# Altium PCB BoardV2.0.PcbDoc
Units mil, origin at the board's own origin, x right, y up, seen from the top; angles counter-clockwise.
Board outline 1628.8 x 2691.79 mil, 2 copper layers (Top Layer, Bottom Layer), stack 65.792 mil thick; 32 components, 24 nets, 140 pads, 14 vias.
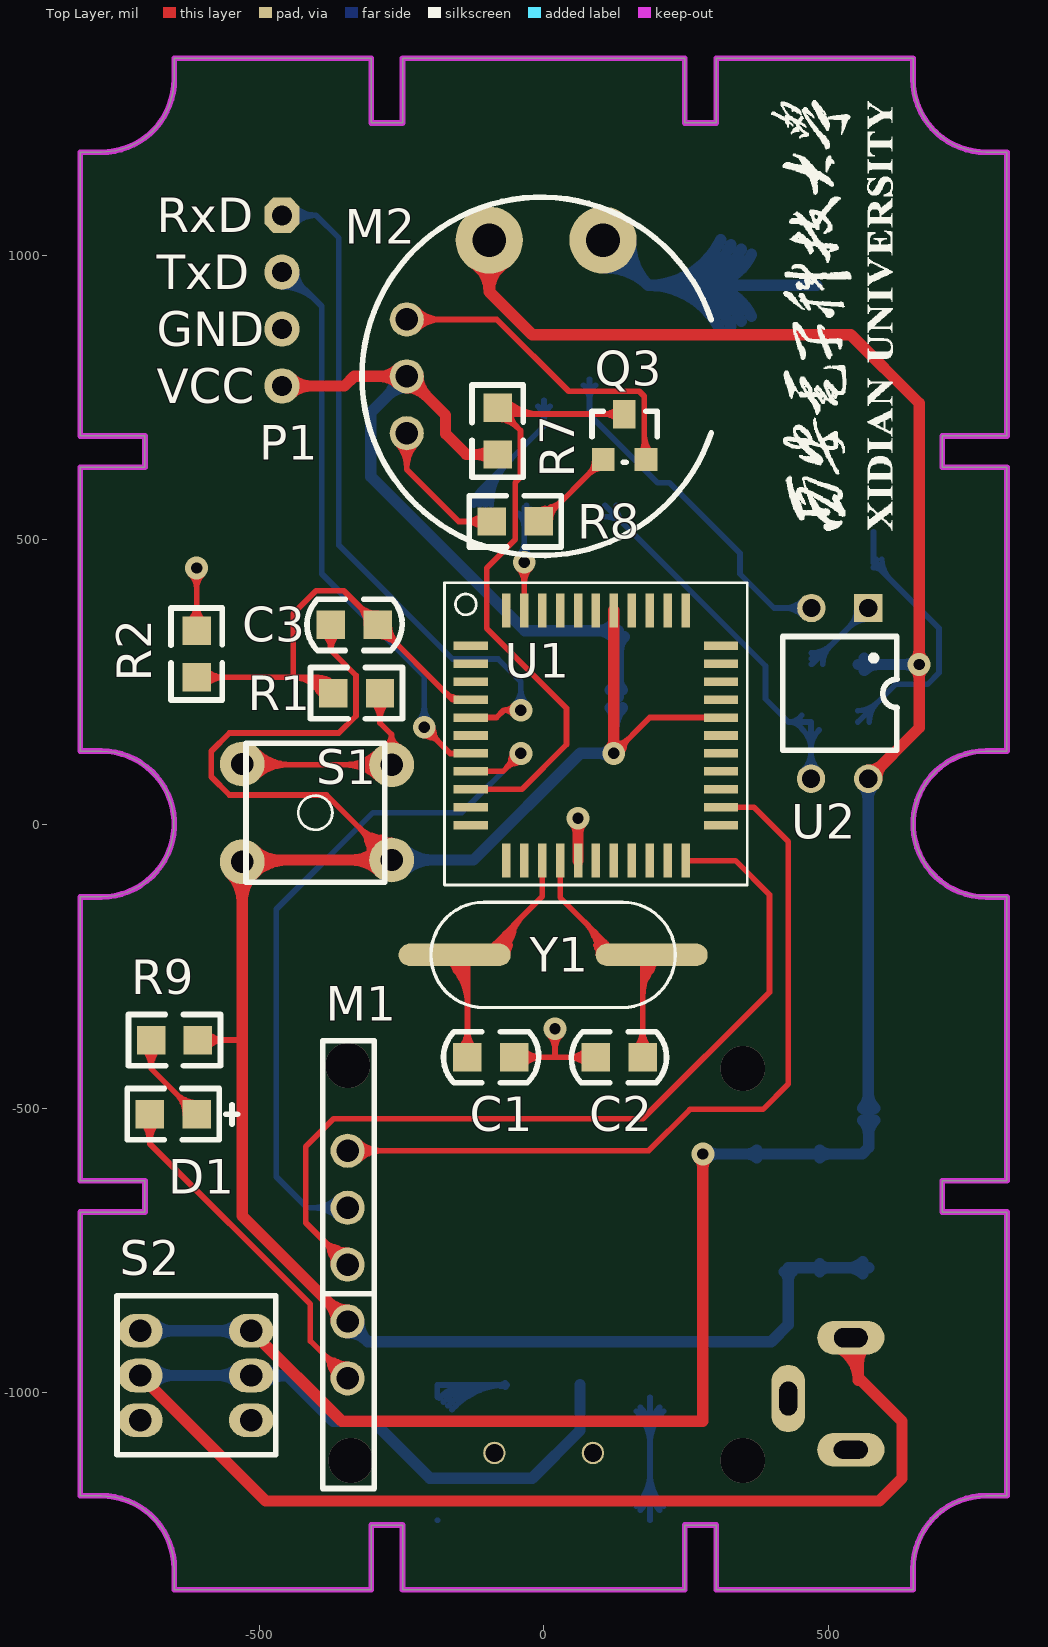
[diagram p0: Top Layer view]
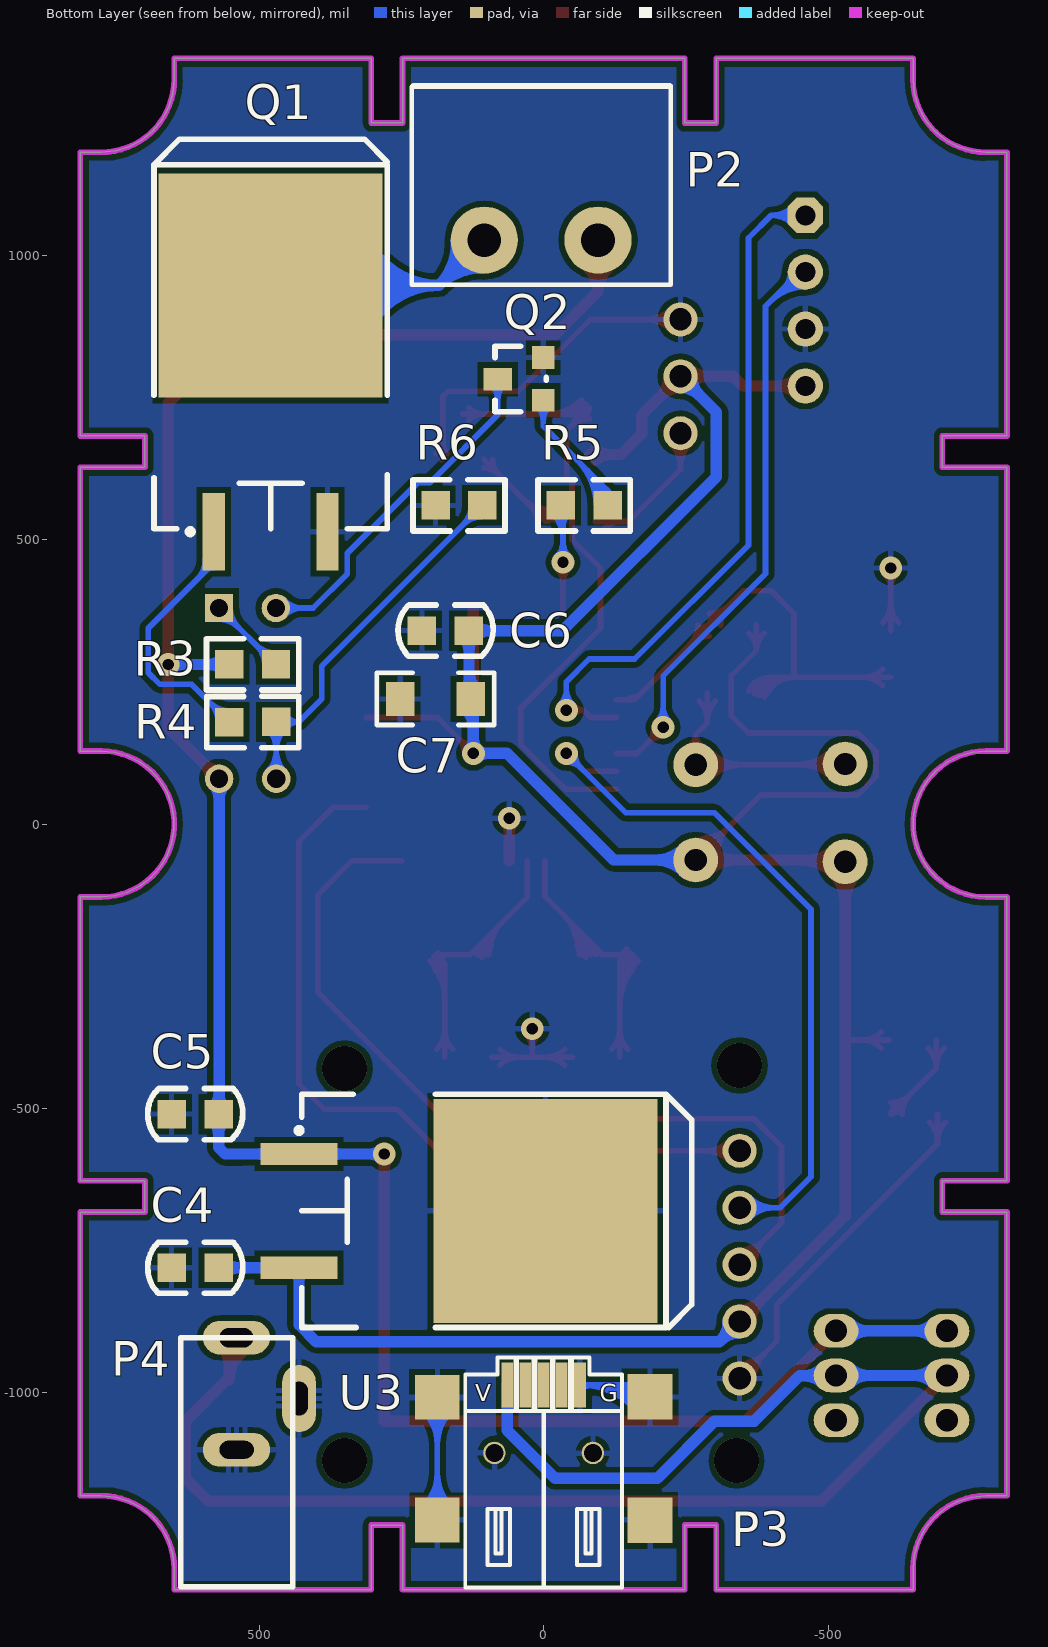
[diagram p1: Bottom Layer view, seen from below]
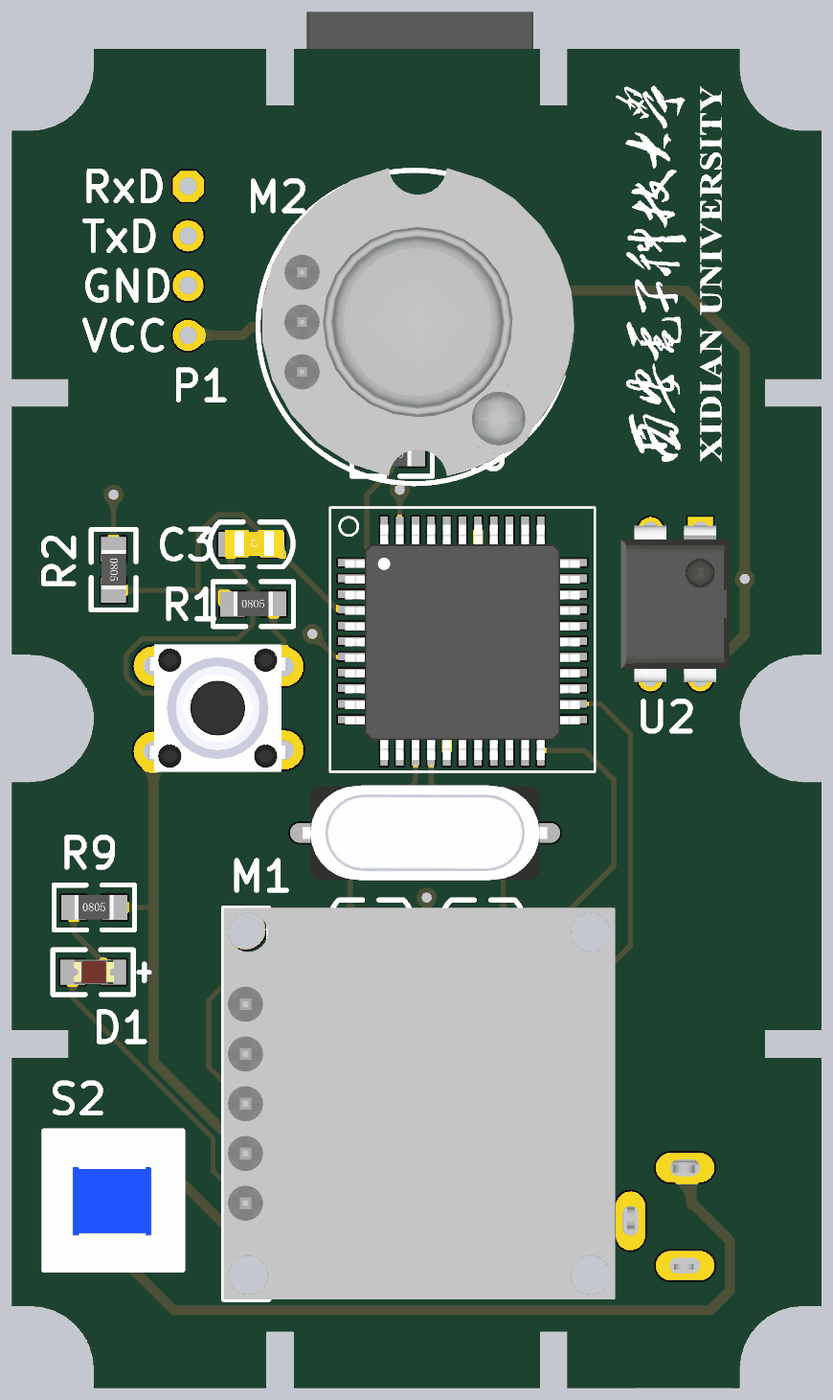
[diagram p2: 3D render of the assembled board from above, using the file's embedded part models]
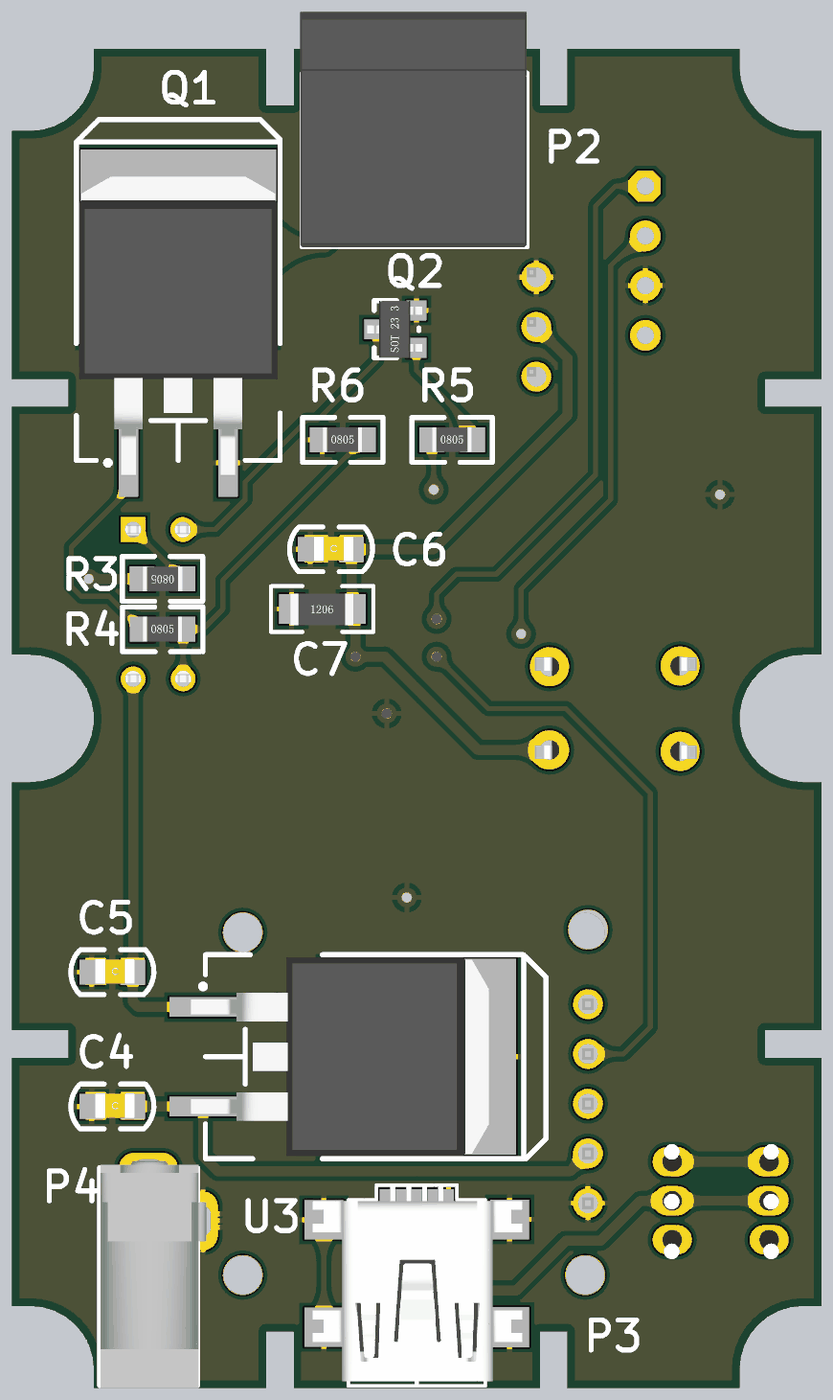
[diagram p3: 3D render of the assembled board from below, using the file's embedded part models]

## Layer stack, top to bottom
Top Solder: solder mask 0.4, Solder Resist, Dk 3.5
Top Layer: signal copper 1.4
Dielectric 1: dielectric 62.992, FR-4, Dk 4.8
Bottom Layer: signal copper 1.4
Bottom Solder: solder mask 0.4, Solder Resist, Dk 3.5

## Board outline
814.4,626.97 700.79,626.97 700.79,682.09 814.4,682.09 814.4,1180.84 777.56,1180.84 752.55,1183.3 728.49,1190.6 706.33,1202.45 686.9,1218.39 670.95,1237.82 659.1,1259.99 651.81,1284.04 649.34,1309.06 649.34,1345.9 303.15,1345.9 303.15,1232.28 248.03,1232.28 248.03,1345.9 -248.03,1345.9 -248.03,1232.28 -303.15,1232.28 -303.15,1345.9 -649.34,1345.9 -649.34,1309.06 -651.81,1284.04 -659.1,1259.99 -670.95,1237.82 -686.9,1218.39 -706.33,1202.45 -728.49,1190.6 -752.54,1183.3 -777.56,1180.84 -814.4,1180.84 -814.4,682.09 -700.79,682.09 -700.79,626.97 -814.4,626.97 -814.4,128.22 -777.56,128.22 -754,126.03 -731.24,119.56 -710.06,109.01 -691.18,94.75 -675.24,77.27 -662.78,57.15 -654.24,35.09 -649.89,11.83 -649.89,-11.83 -654.24,-35.09 -662.78,-57.15 -675.24,-77.27 -691.18,-94.75 -710.06,-109.01 -731.24,-119.56 -754,-126.03 -777.56,-128.21 -814.4,-128.21 -814.4,-626.97 -700.79,-626.97 -700.79,-682.09 -814.4,-682.09 -814.4,-1180.84 -777.56,-1180.84 -752.54,-1183.3 -728.49,-1190.6 -706.33,-1202.45 -686.9,-1218.39 -670.95,-1237.82 -659.1,-1259.99 -651.81,-1284.04 -649.34,-1309.05 -649.34,-1345.89 -303.15,-1345.89 -303.15,-1232.28 -248.03,-1232.28 -248.03,-1345.89 248.03,-1345.89 248.03,-1232.28 303.15,-1232.28 303.15,-1345.89 649.34,-1345.89 649.34,-1309.05 651.81,-1284.04 659.1,-1259.99 670.95,-1237.82 686.9,-1218.39 706.33,-1202.45 728.49,-1190.6 752.55,-1183.3 777.56,-1180.84 814.4,-1180.84 814.4,-682.09 700.79,-682.09 700.79,-626.97 814.4,-626.97 814.4,-128.21 777.56,-128.21 754,-126.03 731.24,-119.56 710.06,-109.01 691.18,-94.75 675.24,-77.27 662.79,-57.15 654.24,-35.09 649.89,-11.83 649.89,11.83 654.24,35.09 662.79,57.15 675.24,77.27 691.18,94.75 710.06,109.01 731.24,119.56 754,126.03 777.56,128.22 814.4,128.22

## Design rules (kind name [scope] priority, off if disabled: settings)
Clearance Clearance_1 [All] p1: gap=10
Clearance [InNet('GND') vs OnLayer('Keep-Out Layer')] p2: gap=50
PlaneClearance [All] p1: clearance=30
PolygonConnect [All] p1: connectstyle=Relief reliefconductorwidth=10 reliefentries=4 polygonreliefangle="90 Angle" airgapwidth=10
RoomDefinition Reset [InComponentClass('Reset')] p1: confinementstyle=ConfineIn formatcopy=TRUE lockcomponents=FALSE outline -814.4,-130 -210,-130 -210,610 -814.4,610
RoomDefinition Power [InComponentClass('Power')] p2: confinementstyle=ConfineIn formatcopy=TRUE lockcomponents=FALSE outline -820,-1362.47 830,-1362.47 830,-190 -820,-190
RoomDefinition Oscillator [InComponentClass('Oscillator')] p3: confinementstyle=ConfineIn formatcopy=TRUE lockcomponents=FALSE outline -264.8,-830 443.86,-830 443.86,-121.34 -264.8,-121.34
RoomDefinition Microcontroller_STC12C5A60S2 [InComponentClass('Microcontroller_STC12C5A60S2')] p4: confinementstyle=ConfineIn formatcopy=TRUE lockcomponents=FALSE outline -810,-120 620,-120 620,1360 -810,1360
RoomDefinition Level_Switch [InComponentClass('Level_Switch')] p5: confinementstyle=ConfineIn formatcopy=TRUE lockcomponents=FALSE outline -169.36,441.78 421.19,441.78 421.19,948.43 -169.36,948.43
RoomDefinition LED [InComponentClass('LED')] p6: confinementstyle=ConfineIn formatcopy=TRUE lockcomponents=FALSE outline 249.03,1390.42 -262.78,1390.42 -262.78,760.5 249.03,760.5
RoomDefinition Human_Body_Detection [InComponentClass('Human_Body_Detection')] p7: confinementstyle=ConfineIn formatcopy=TRUE lockcomponents=FALSE outline -358.66,432.6 350,432.6 350,1220 -358.66,1220
RoomDefinition Gesture_Recognition [InComponentClass('Gesture_Recognition')] p8: confinementstyle=ConfineIn formatcopy=TRUE lockcomponents=FALSE outline -427.56,-1207.56 438.58,-1207.56 438.58,-262.68 -427.56,-262.68
RoomDefinition Amplifier [InComponentClass('Amplifier')] p9: confinementstyle=ConfineIn formatcopy=TRUE lockcomponents=FALSE outline -842.1,-2.65 810,-2.65 810,1460 -842.1,1460
RoutingVias [All] p1: holewidth=28 width=50 viastyle="Through Hole" minholewidth=28 minwidth=50 maxholewidth=28 maxwidth=50
SolderMaskExpansion [All] p1: expansion=4
Width [All] p1: maxlimit=10 minlimit=10 preferedwidth=10
28 further rules are at their usual default settings.

## Classes and differential pairs
component class Amplifier: Q1 Q2 R3 R4 R5 R6 U2
component class Gesture_Recognition: M1
component class Human_Body_Detection: M2
component class LED: P2
component class Level_Switch: Q3 R7 R8
component class Microcontroller_STC12C5A60S2: C6 C7 P1 U1
component class Oscillator: C1 C2 Y1
component class Power: C4 C5 D1 P3 P4 R9 S2 U3
component class Reset: C3 R1 R2 S1

## Components (designator, comment, footprint, x,y, rotation, side; value= is the part's Value field where it differs from the comment)
C1 "Cap" C0805 -140,-410 r0 top
C2 "Cap" C0805 180,-410 r180 top
C3 "Cap" C0805 -380,350 r0 top
C4 "Cap" C0805 660,-780 r180 bottom
C5 "Cap" C0805 660,-510 r180 bottom
C6 "Cap" C0805 220,340 r180 bottom
C7 "Cap" 1206C 190,220 r180 bottom
D1 "LED" L0805R -610,-510 r180 top
M1 "PAJ7620U2" PAJ7620U2_INTERFACE 5.51,-774.49 r0 top
M2 "Human_Sensor" PM-6 -4.33,786.93 r0 top
P1 "Header 4" HDR1X4HA -460,1070 r270 top
P2 "Header 2" CCM-5.08-2P -223.17,947.66 r0 bottom
P3 "USB" USB-MINI 0,-1150 r180 bottom
P4 "Power_Connect" DC_002 540,-1100 r90 bottom
Q1 "MOSFET-N" TO-263 479.89,513.82 r180 bottom
Q2 "NPN" SOT-23 0,740 r90 bottom
Q3 "NPN" SOT-23 100,640 r0 top
R1 "Res1" R0805 -370,230 r0 top
R2 "Res1" R0805 -610,340 r270 top
R3 "Res1" R0805 470.49,280.68 r0 bottom
R4 "Res1" R0805 552.34,179.23 r180 bottom
R5 "Res1" R0805 -30,560 r180 bottom
R6 "Res1" R0805 190,560 r180 bottom
R7 "Res1" R0805 -80.84,731.78 r270 top
R8 "Res1" R0805 -90.84,531.78 r0 top
R9 "Res1" R0805 -690,-380 r0 top
S1 "SW-PB" KEY-DIP4 -400,20 r180 top
S2 "SW-PB" SW7X7 -750,-830 r0 top
U1 "STC12C5A60S2_44PIN" STC12C5A60S2_44PIN -128.03,313.07 r0 top
U2 "Optoisolator1" DIP_4 415,225 r180 top
U3 "LM7805" TO-263 430,-680 r270 bottom
Y1 "XTAL" XTAL-HC49S-SMD 115.2,-230 r180 top

## Footprints (in the part's own frame and the unit in brackets; to place one, negate y for a bottom-side part, rotate by r counter-clockwise, add the part's x,y. Pads: shape width x height; smd on the part's side, far side on the other; paste and mask are expansions set on the pad)
1206C [mil] "3.2mmx1.6mm（蒜米工坊）"
  rect 50x60 smd: 1(-62,0) 2(62,0)
  silkscreen extent -103,-46 103,46, body extent -64,-32 62,31, height 24
C0805 [mil]
  rect 50x50 smd: 1(6,0) 2(88.7,-0.1)
  silkscreen extent -36,-45 131,45, body extent -6,-26 112,29, height 37
CCM-5.08-2P [mm]
  round 3 hole 1.5: 1(3.24,-2) 2(8.32,-2)
  silkscreen extent 0,-8.88 11.56,0, body extent 0.06,-12 11.62,0, height 8.5
DC_002 [mm]
  round 1.5 hole 0.8: 1(0,-0.381) 1(0,0.356) 2(5.004,-0.33) 2(5.004,0.33) 3(1.956,-2.794) 3(2.642,-2.794)
  oval 1.5x3 hole 0.8 slot 1.5 at 90 deg: 1(0,0)
  oval 1.5x3 hole 0.86 slot 1.5 at 90 deg: 2(5.004,0)
  oval 3x1.5 hole 0.8 slot 1.5 at 0 deg: 3(2.286,-2.794)
  silkscreen extent -6.12,-2.51 5,2.49, body extent -6.26,-2.96 5.34,2.44, height 7.4
DIP_4 [mil]
  rect 50x50 hole 32: 1(-155.68,-154.68)
  round 50 hole 32: 2(-55.68,-154.68) 3(-55,145.5) 4(-155.5,145.5)
  silkscreen extent -206,-105 -5,95, body extent -214,-162 4,152, height 168
HDR1X4HA [mil]
  oct 62x62 hole 35: 1(0,0)
  round 62 hole 35: 2(100,0) 3(200,0) 4(300,0)
KEY-DIP4 [mm] "6X6"
  round 2 hole 1: 1(-3.373,2.116) 1(3.299,2.189) 2(-3.373,-2.134) 2(3.299,-2.172)
  silkscreen extent -3.06,-3.09 3.13,3.1, body extent -4.12,-3.27 4.14,3.23, height 4.3
L0805R [mil] "1/8W"
  rect 50x50 smd: 1(0,0) 2(82.3,0.2)
  silkscreen extent -72,-45 122,45, body extent 0,-25 79,25, height 43
PAJ7620U2_INTERFACE [mil]
  round 60 hole 39.37: 1(-350,-200) 2(-350,-100) 3(-350,0) 4(-350,100) 5(-350,200)
  silkscreen extent -394,-394 -303,394, body extent -394,-394 394,394, height 210
PM-6 [mil] "Human_Sensor"
  round 60 hole 39.37: 1(-236.22,-100) 2(-236.22,0) 3(-236.22,100)
  silkscreen extent -315,-315 299,315, body extent -306,-300 321,319, height 460
R0805 [mil] "1/8W"
  rect 50x50 smd: 1(0,0) 2(82.3,0.2)
  silkscreen extent -40,-45 122,45, body extent 1,-24 80,25, height 22
SOT-23 [mil]
  rect 40x40 smd: 1(4.88,0.63) 2(79.88,0.63)
  rect 40x50 smd: 3(41.88,80.63)
  silkscreen extent -15,-4 100,86, body extent -15,-11 99,99, height 47
STC12C5A60S2_44PIN [mil]
  rect 60x15 smd: 1(-0.01,-0.03) 2(-0.01,-31.53) 3(-0.01,-63.02) 4(-0.01,-94.52) 5(-0.01,-126.02) 6(-0.01,-157.51) 7(-0.01,-189.01) 8(-0.01,-220.5) 9(-0.01,-252) 10(-0.01,-283.5) 11(-0.01,-314.99) 23(439.99,-314.99) 24(439.99,-283.5) 25(439.99,-252) 26(439.99,-220.5) 27(439.99,-189.01) 28(439.99,-157.51) 29(439.99,-126.02) 30(439.99,-94.52) 31(439.99,-63.02) 32(439.99,-31.53) 33(439.99,-0.03)
  rect 15x60 smd: 12(62.51,-377.51) 13(94.01,-377.51) 14(125.5,-377.51) 15(157,-377.51) 16(188.5,-377.51) 17(219.99,-377.51) 18(251.49,-377.51) 19(282.98,-377.51) 20(314.48,-377.51) 21(345.98,-377.51) 22(377.47,-377.51) 34(377.47,62.49) 35(345.98,62.49) 36(314.48,62.49) 37(282.98,62.49) 38(251.49,62.49) 39(219.99,62.49) 40(188.5,62.49) 41(157,62.49) 42(125.5,62.49) 43(94.01,62.49) 44(62.51,62.49)
  silkscreen extent -46,-420 486,111, body extent -16,-396 456,76, height 41
SW7X7 [mm]
  oval 2x1.5 hole 1: 1(1.041,-1.549) 1(5.994,-1.549) 2(1.041,-3.543) 2(5.994,-3.543) 3(1.041,-5.537) 3(5.994,-5.537)
  silkscreen extent 0,-7.09 7.09,0.03, body extent -0.02,-7.09 6.98,-0.09, height 13
TO-263 [mm]
  rect 1x3.45 smd: 1(-2.54,0) 3(2.54,0)
  rect 10x10 smd: 2(0,11)
  silkscreen extent -5.21,-0.12 5.21,17.53, body extent -5.08,-0.65 5.08,14.61, height 4.88
USB-MINI [mm]
  rect 2x2 smd: 0(-4.746,-1.872) 0(-4.746,3.612)
  round 1 hole 0.8: 0(-2.2,1.128) 0(2.2,1.128)
  rect 2x2.032 smd: 0(4.746,-1.872) 0(4.746,3.628)
  rect 0.52x2 smd: 1(-1.626,4.166) 2(-0.813,4.166) 3(0,4.166) 4(0.813,4.166) 5(1.626,4.166)
  silkscreen extent -3.5,-4.87 3.5,5.38, body extent -5.32,-4.63 5.38,4.57, height 3.95
XTAL-HC49S-SMD [mm]
  oval 5x1 smd: 1(-1.9,0) 2(6.9,0)
  silkscreen extent -2.95,-2.35 7.95,2.35, body extent -3.75,-2.4 8.75,2.4, height 4.02

## Part data
C1 C2 C3 C4 C5 C6 C7: "Non-Polar Capacitor"
D1: "Typical INFRARED GaAs LED"
M1: library part PAJ7620U2_Interface
P1: "Header, 4-Pin"
P2: "Header, 2-Pin"
P3: library part USBPort
P4: library part Power
Q1: "N-Channel MOSFET"
Q2 Q3: "NPN Bipolar Transistor"
R1 R2 R3 R4 R5 R6 R7 R8 R9: "Resistor"
S1 S2: "Switch"
U1: "MCU"
U2: "4-Pin Phototransistor Optocoupler"
Y1: library part XTAL_1, "Crystal Oscillator"

## Via types
v1: diameter 40, hole 20, Top Layer to Bottom Layer, tented both sides, 10 vias
v2: diameter 78.74, hole 78.74, Top Layer to Bottom Layer, 4 vias

## Nets (pads, with @x,y where several pads share a name; then routed paths per layer and width w, separated by ;. In a path a pad name is that pad's centre, name@x,y a point inside that pad or via, vN(x,y) a via of type N, cw(c..) or ccw(c..) an arc to the next point about the centre after c; other vN are vias at no path point)
GND: C1.2 C2.2 C4.1 C5.1 C6.1 C7.1 D1.2 M1.1 M2.3 P1.3 P3.0 P3.5 P4.1 P4.3 Q1.3 Q2.2 Q3.2 R2.1 R6.1 U1.16 U3.2 | length 5299.7
  Top Layer w10: D1.2 -692.3,-562.03 -410,-844.33 -410,-908.98 M1.1 ; R2.1 v1(-610,450) ; -375.83,-950.81 ccw(c-337.54,-940.55) M1.1@-345.49,-979.39 ; -368.17,-943.14 cw(c-378.43,-981.44) M1.1@-339.59,-973.49 ; M2.3 -82.28,886.93 44.02,760.63 168.09,760.63 176.88,751.84 176.88,643.63 Q3.2 ; C1.2 20,-410.1 ; v1(20,-360) 20,-410.1 ; C2.2 91.1,-410.1 20,-410.1 ; -692.3,-558.48 cw(c-644.02,-558.48) -678.16,-524.34 ccw(c-644.02,-558.48) -692.3,-558.48 ; -692.3,-558.48 ccw(c-740.58,-558.48) -706.44,-524.34 cw(c-740.58,-558.48) -692.3,-558.48 ; -610,388.28 cw(c-658.28,388.28) -624.14,354.14 ccw(c-658.28,388.28) -610,388.28 ; -610,388.28 ccw(c-561.72,388.28) -595.86,354.14 cw(c-561.72,388.28) -610,388.28 ; -610,413.79 cw(c-573.79,413.79) -599.39,439.39 ccw(c-573.79,413.79) -610,413.79 ; -610,413.79 ccw(c-646.21,413.79) -620.61,439.39 cw(c-646.21,413.79) -610,413.79 ; -387.17,-931.81 cw(c-429.84,-974.49) -369.49,-974.49 ccw(c-429.84,-974.49) -387.17,-931.81 ; -387.17,-931.81 ccw(c-344.49,-889.13) -344.49,-949.49 cw(c-344.49,-889.13) -387.17,-931.81 ; -370.09,-948.88 cw(c-395.7,-974.49) -359.49,-974.49 ccw(c-395.7,-974.49) -370.09,-948.88 ; -370.09,-948.88 ccw(c-344.49,-923.28) -344.49,-959.49 cw(c-344.49,-923.28) -370.09,-948.88 ; -204.34,886.93 cw(c-204.34,923.14) -229.94,897.54 ccw(c-204.34,923.14) -204.34,886.93 ; -204.34,886.93 ccw(c-204.34,850.72) -229.94,876.32 cw(c-204.34,850.72) -204.34,886.93 ; -180.2,886.93 cw(c-180.2,947.28) -222.87,904.61 ccw(c-180.2,947.28) -180.2,886.93 ; -180.2,886.93 ccw(c-180.2,826.57) -222.87,869.25 cw(c-180.2,826.57) -180.2,886.93 ; -3.01,-410.1 cw(c-3.01,-361.81) -37.16,-395.96 ccw(c-3.01,-361.81) -3.01,-410.1 ; -3.02,-410.1 ccw(c-3.02,-458.38) -37.16,-424.24 cw(c-3.02,-458.38) -3.02,-410.1 ; 20,-396.21 cw(c56.21,-396.21) 30.61,-370.61 ccw(c56.21,-396.21) 20,-396.21 ; 20,-396.21 ccw(c-16.21,-396.21) 9.39,-370.61 cw(c-16.21,-396.21) 20,-396.21 ; 42.53,-410.1 ccw(c42.53,-361.13) 77.16,-395.76 cw(c42.53,-361.13) 42.53,-410.1 ; 43.5,-410.1 cw(c43.5,-457.7) 77.16,-424.04 ccw(c43.5,-457.7) 43.5,-410.1 ; Q3.2@169.28,651.24 ccw(c150.91,669.6) 176.88,669.6 cw(c150.91,669.6) Q3.2@169.28,651.24 ; 176.88,684.09 ccw(c223.34,684.09) 190.49,651.24 cw(c223.34,684.09) 176.88,684.09
  Top Layer w20: U1.16 v1(60.46,10) ; 60.46,-14.14 cw(c84.61,-14.14) 67.53,2.93 ccw(c84.61,-14.14) 60.46,-14.14 ; 60.46,-14.14 ccw(c36.32,-14.14) 53.39,2.93 cw(c36.32,-14.14) 60.46,-14.14
  Bottom Layer w10: P3.0@-186.85,-1223.7 P3.0@-186,-1223.7 ; P3.0@-186,-1007.16 -186.85,-1007.16 -186.85,-986 P3.5 ; P3.0@-152.76,-1010.92 cw(c-128.87,-1014) -142.05,-993.84 ; P3.0@-86.61,-1105.59 P3.0@-86.2,-1106 ; P3.5@-68.23,-982.91 cw(c-78.44,-975.46) -76.49,-987.95 cw(c-74.55,-1000.44) P3.5@-67.09,-990.23 ; P3.0@86.2,-1106 P3.0@86.61,-1105.59 ; P3.0@186.85,-1223.7 P3.0@186.85,-1007.79 ; -76.65,-986 cw(c-76.65,-998.64) -67.7,-989.7 ccw(c-76.65,-998.64) -76.65,-986 ; -76.64,-986 ccw(c-76.64,-973.36) -67.7,-982.3 cw(c-76.64,-973.36) -76.64,-986 ; P3.5 ccw(c-64.01,-1116.51) -161.24,-1029.46 cw(c-64.01,-1116.51) P3.5 ; 186.85,-1164.86 cw(c128.01,-1164.86) 169.62,-1206.46 ccw(c128.01,-1164.86) 186.85,-1164.86 ; 186.85,-1164.86 ccw(c245.68,-1164.86) 204.08,-1206.46 cw(c245.68,-1164.86) 186.85,-1164.86 ; 186.85,-1140.72 cw(c103.87,-1140.72) 162.55,-1199.39 ccw(c103.87,-1140.72) 186.85,-1140.72 ; 186.85,-1140.72 ccw(c269.82,-1140.72) 211.15,-1199.39 cw(c269.82,-1140.72) 186.85,-1140.72 ; 186.85,-1090.77 cw(c269.82,-1090.77) 211.15,-1032.1 ccw(c269.82,-1090.77) 186.85,-1090.77 ; 186.85,-1090.77 ccw(c103.87,-1090.77) 162.55,-1032.1 cw(c103.87,-1090.77) 186.85,-1090.77 ; 186.85,-1066.62 cw(c245.68,-1066.62) 204.08,-1025.02 ccw(c245.68,-1066.62) 186.85,-1066.62 ; 186.85,-1066.63 ccw(c128.01,-1066.63) 169.62,-1025.02 cw(c128.01,-1066.63) 186.85,-1066.63 ; P3.0@-183.6,-1009.45 cw(c-131.13,-1056.42) -131.13,-986 ccw(c-131.13,-1056.42) P3.0@-183.6,-1009.45 ; P3.0@-176.15,-1016.12 cw(c-108.76,-1076.45) -108.76,-986 ccw(c-108.76,-1076.45) P3.0@-176.15,-1016.12 ; P3.0@-168.69,-1022.79 cw(c-86.38,-1096.48) -86.38,-986 ccw(c-86.38,-1096.48) P3.0@-168.69,-1022.79
INT0: M1.4 U1.8 | length 1634.1
  Top Layer w10: U1.8 -71.5,92.57 v1(-40,124.06) ; -57.97,112.98 cw(c-36.56,107.24) v1@-41,128.96 ; -51.08,106.09 ccw(c-56.82,127.51) v1@-35.1,123.06 ; -65.61,98.46 cw(c-40,72.85) -40,109.06 ccw(c-40,72.85) -65.61,98.46 ; -65.61,98.46 ccw(c-91.21,124.06) -55,124.06 cw(c-91.21,124.06) -65.61,98.46
  Bottom Layer w10: M1.4@-362.17,-692.17 ccw(c-404.84,-734.84) -404.84,-674.49 ccw(c-404.85,-614.13) M1.4@-362.17,-656.81 ; M1.4@-355.09,-685.09 ccw(c-380.7,-710.7) -380.7,-674.49 ccw(c-380.7,-638.27) M1.4@-355.09,-663.88 ; M1.4 -415.51,-674.49 -470,-620 -470,-150 -300,20 -144.06,20 v1(-40,124.06) ; v1@-55,124.06 cw(c-91.21,124.06) -65.61,98.46 cw(c-40,72.85) v1@-40,109.06
INT1: Q3.3 R7.1 U1.9 | length 1752.8
  Top Layer w10: U1.9 -38.32,61.07 40.2,139.59 40.2,203.51 -100,343.71 -100,450 -50,500 -50,600.12 -40.64,609.48 -40.64,691.58 R7.1@-69.69,720.63 ; R7.1@-80.21,732.41 R7.1 ; R7.1@-61.52,736.96 ccw(c-46.74,740.92) -54.39,727.66 ; -55.65,705.03 cw(c-46.6,738.79) R7.1 ; -54.09,706.58 ccw(c-87.86,697.53) R7.1 ; Q3.3 R7.1@-69.69,720.63 ; R7.1 ccw(c-53.92,758.7) -53.92,720.63 cw(c-53.92,758.7) R7.1 ; R7.1 R7.1@-69.69,720.63 ; -46.7,697.63 cw(c-12.55,731.78) -60.84,731.78 ccw(c-12.55,731.78) -46.7,697.63 ; -46.7,697.64 ccw(c-80.84,663.5) -80.84,711.78 cw(c-80.84,663.5) -46.7,697.64 ; 105.67,720.63 cw(c105.67,684.42) 131.28,710.02 ccw(c105.67,684.42) 105.67,720.63 ; 105.67,720.63 ccw(c105.67,756.85) 131.28,731.24 cw(c105.67,756.85) 105.67,720.63 ; R7.1@-73.77,738.85 ccw(c-29.78,782.84) -29.78,720.63 cw(c-29.78,782.84) R7.1@-73.77,738.85 ; R7.1@-66.7,745.92 ccw(c-5.64,806.98) -5.64,720.63 cw(c-5.64,806.98) R7.1@-66.7,745.92
NetD1_1: D1.1 R9.1 | length 543.9
  Top Layer w10: R9.1 -690,-430 D1.1 ; -636.75,-484.8 ccw(c-602.99,-475.76) D1.1 ; -635.2,-483.25 cw(c-644.24,-517.01) D1.1 ; -690,-428.28 cw(c-641.72,-428.28) -675.86,-394.14 ccw(c-641.72,-428.28) -690,-428.28 ; -690,-428.28 ccw(c-738.28,-428.28) -704.14,-394.14 cw(c-738.28,-428.28) -690,-428.28 ; -644.14,-475.86 cw(c-678.28,-510) -630,-510 ccw(c-678.28,-510) -644.14,-475.86 ; -644.14,-475.86 ccw(c-610,-441.72) -610,-490 cw(c-610,-441.72) -644.14,-475.86
NetM2_1: M2.1 R8.1 | length 706.4
  Top Layer w10: M2.1 -240.55,623.17 -149.16,531.78 R8.1 ; -240.55,626.57 cw(c-180.2,626.57) -222.87,669.25 ccw(c-180.2,626.57) -240.55,626.57 ; -240.55,626.57 ccw(c-300.91,626.57) -258.23,669.25 cw(c-300.91,626.57) -240.55,626.57 ; -240.55,650.72 cw(c-204.34,650.72) -229.94,676.32 ccw(c-204.34,650.72) -240.55,650.72 ; -240.55,650.71 ccw(c-276.77,650.71) -251.16,676.32 cw(c-276.77,650.71) -240.55,650.71 ; -139.12,531.78 cw(c-139.12,483.5) -104.98,517.64 ccw(c-139.12,483.5) -139.12,531.78 ; -139.13,531.78 ccw(c-139.13,580.07) -104.98,545.92 cw(c-139.13,580.07) -139.13,531.78
NetQ1_1: Q1.1 R4.1 | length 626.7
  Bottom Layer w10: R4.1 618.59,245.48 674.5,245.48 695,265.99 695,344.05 579.89,459.16 Q1.1 ; R4.1@552.34,199.23 ccw(c552.34,247.51) 586.48,213.37 ccw(c620.63,179.23) R4.1@572.34,179.23 ; Q1.1@579.89,450.91 cw(c579.89,430.98) 593.98,445.07 ; Q1.1@584.58,465.59 ccw(c611.41,465.59) Q1.1@592.43,446.62 ; Q1.1@594.58,465.59 ccw(c645.55,465.59) 609.51,429.55
NetQ2_1: Q2.3 U2.2 | length 747.3
  Bottom Layer w10: Q2.3@70.02,771.28 cw(c44.41,745.67) 80.63,745.67 cw(c116.84,745.67) Q2.3@91.24,771.28 ; Q2.3 80.63,719.37 200,600 221.21,600 345.21,476.01 345.21,439.7 405.22,379.68 U2.2 ; U2.2@456.54,365.54 ccw(c422.4,331.4) 422.4,379.68 ccw(c422.4,427.97) U2.2@456.54,393.82
NetQ2_2: Q2.1 R5.2 | length 562.8
  Bottom Layer w10: R5.2@-122.3,560.2 cw(c-83.1,560.2) -110.82,587.92 ; R5.2@-102.3,560.2 cw(c-14.82,560.2) -76.68,622.06 ; -93.75,604.99 ccw(c-48.96,560.2) R5.2 -112.3,586.44 ; R5.2@-92.3,560.2 cw(c19.33,560.2) -59.61,639.13 ; Q2.1@-9.98,734.28 cw(c-35.59,708.67) 0.63,708.67 cw(c36.84,708.67) Q2.1@11.24,734.28 ; Q2.1 0.63,699.37 -112.3,586.44 ; -112.3,586.44 cw(c-119.51,586.44) -117.6,579.49 ccw(c-119.51,586.44) -112.3,586.44 ; -112.3,586.44 ccw(c-105.09,586.44) -107,579.49 cw(c-105.09,586.44) -112.3,586.44
NetQ3_2: Q3.1 R8.2 | length 551.1
  Top Layer w10: R8.2@-18.15,534.75 cw(c9.96,526.65) R8.2@2.39,554.91 ; 19.49,559.49 ccw(c29.82,520.93) R8.2 -3.77,531.98 Q3.1 ; 79.27,615.02 cw(c104.88,589.42) 104.88,625.63 ccw(c104.88,589.42) 79.27,615.02 ; 79.28,615.02 ccw(c53.67,640.63) 89.88,640.63 cw(c53.67,640.63) 79.28,615.02 ; R8.2@-8.54,541.98 ccw(c-8.54,577.64) 16.68,552.43 cw(c-8.54,577.64) R8.2@-8.54,541.98 ; R8.2@-8.54,551.98 ccw(c-8.54,611.79) 33.75,569.5 cw(c-8.54,611.79) R8.2@-8.54,551.98 ; R8.2@11.46,531.98 cw(c48.22,531.98) 22.22,557.97 ccw(c48.22,531.98) R8.2@11.46,531.98
NetR1_2: R1.2 S1.2 | length 1052.3
  Top Layer w10: S1.2@-529.9,105.5 -528.4,104 -267.2,104 -267.2,157.2 ; S1.2@-512.67,88.27 cw(c-474.69,50.29) -474.69,104 ; S1.2@-512.67,122.73 ccw(c-467.44,167.96) -467.44,104 ; S1.2@-505.6,81.2 cw(c-450.54,26.14) -450.54,104 ; S1.2@-505.6,129.8 ccw(c-443.3,192.1) -443.3,104 ; S1.2@-291.5,79.7 ccw(c-350.18,21.02) -350.18,104 ccw(c-350.18,186.98) S1.2@-291.5,128.3 ; R1.2 -287.7,177.7 -267.2,157.2 ; S1.2@-284.43,86.77 ccw(c-326.03,45.17) -326.03,104 ccw(c-326.03,162.83) S1.2@-284.43,121.23 ; S1.2@-281.33,135.33 ccw(c-291.19,157.2) -267.2,157.2 ; S1.2@-253.07,135.33 cw(c-243.21,157.2) -267.2,157.2 ; -287.7,181.91 cw(c-239.41,181.91) -273.56,216.06 ccw(c-239.41,181.91) -287.7,181.91 ; -287.7,181.92 ccw(c-335.98,181.92) -301.84,216.06 cw(c-335.98,181.92) -287.7,181.92
  Bottom Layer w10: S1.2@-267.2,104 S1.2@-267.2,106
NetR3_1: R3.1 U2.1 | length 314.1
  Bottom Layer w10: R3.1 471.68,280.68 U2.1 ; R3.1@470.49,290.68 ccw(c470.49,317.71) R3.1@489.6,298.6 ; R3.1@470.49,300.68 ccw(c470.49,351.85) 506.67,315.67 ; R3.1@490.49,280.68 cw(c535.89,280.68) 503.79,312.79 ; U2.1@550.68,379.68 cw(c502.4,379.68) 536.54,345.54 cw(c570.68,311.4) U2.1@570.68,359.68
NetR4_2: R4.2 R6.2 U2.3 | length 935.7
  Bottom Layer w10: R6.2@107.7,540.2 cw(c107.7,491.91) 141.85,526.06 cw(c175.98,560.2) R6.2@127.7,560.2 ; R6.2 390,277.9 390,220 430.57,179.43 ; R4.2@453.91,167.6 ccw(c430.57,150.49) 430.57,179.43 ; R4.2@453.91,191.25 cw(c430.57,208.37) 430.57,179.43 ; U2.3@455.86,93.64 ccw(c421.72,127.78) 470,127.78 ccw(c518.28,127.78) U2.3@484.14,93.64 ; R4.2@455.9,165.28 cw(c421.85,131.23) 470,131.23 ; U2.3 R4.2 R4.2 430.57,179.43 ; 470,131.05 cw(c518.41,131.05) R4.2@484.18,165.28
PWM: R5.1 U1.43 | length 462.4
  Top Layer w10: U1.43 v1(-34.02,460) ; -34.02,423.79 cw(c2.19,423.79) -23.42,449.39 ccw(c2.19,423.79) -34.02,423.79 ; -34.02,423.79 ccw(c-70.24,423.79) -44.63,449.39 cw(c-70.24,423.79) -34.02,423.79
  Bottom Layer w10: v1@-44.63,470.61 ccw(c-70.24,496.21) -34.02,496.21 ccw(c2.19,496.21) v1@-23.42,470.61 ; R5.1@-44.14,545.86 cw(c-68.57,521.43) -34.02,521.43 ; v1(-34.02,460) -34.02,555.98 R5.1 ; -34.02,502 cw(c28,502) R5.1@-15.86,545.86 ; -34.02,526.14 cw(c3.86,526.14) R5.1@-22.93,552.93
PWM_GND: P2.2 Q1.2 | length 1748.2
  Bottom Layer w20: P2.2 183.9,946.89 ; P2.2@105.48,997.37 cw(c107.79,935.62) 151.48,979.31 cw(c195.17,1023) P2.2@133.42,1025.31 ; P2.2@106.22,977.38 cw(c110.13,873.13) 183.89,946.9 ; P2.2@153.41,1024.57 ccw(c257.66,1020.66) 183.89,946.9 ; Q1.2@311.2,866.53 ccw(c183.91,805.89) 183.91,946.89 ; Q1.2@311.2,1027.25 cw(c183.91,1087.9) 183.91,946.89 ; Q1.2@329.26,875.13 ccw(c215.59,820.99) 215.59,946.89 ccw(c215.59,1072.8) Q1.2@329.26,1018.65 ; Q1.2@347.31,883.74 ccw(c247.27,836.08) 247.27,946.89 ccw(c247.27,1057.71) Q1.2@347.32,1010.05 ; Q1.2@365.37,892.34 ccw(c278.95,851.17) 278.95,946.89 ccw(c278.95,1042.62) Q1.2@365.37,1001.45 ; Q1.2 183.9,946.89
PWM_VCC: C5.2 P2.1 R3.2 S2.1 U2.4 U3.1 | length 5588.4
  Top Layer w10: 660,169 660,170
  Top Layer w20: S2.1@-512.62,-891 -514,-891 -355,-1050 280,-1050 v1(280,-580) ; P2.1 -95.61,935.61 ; U2.4 660,169 ; 660,170 v1(660,280.48) 660,740 540,860 -20,860 -95.61,935.61 ; -95.61,935.61 cw(c-36.13,935.61) -68.73,985.37 ccw(c-36.13,935.61) -95.61,935.61 ; -95.61,935.61 ccw(c-155.09,935.61) -122.49,985.37 cw(c-155.09,935.61) -95.61,935.61 ; 280,-604.14 cw(c304.14,-604.14) 287.07,-587.07 ccw(c304.14,-604.14) 280,-604.14 ; 280,-604.14 ccw(c255.86,-604.14) 272.93,-587.07 cw(c255.86,-604.14) 280,-604.14 ; 596.11,105.11 cw(c570.5,130.71) 570.5,94.5 ccw(c570.5,130.71) 596.11,105.11 ; 596.11,105.11 ccw(c621.71,79.5) 585.5,79.5 cw(c621.71,79.5) 596.11,105.11 ; 660,256.34 cw(c684.14,256.34) 667.07,273.41 ccw(c684.14,256.34) 660,256.34 ; 660,256.34 ccw(c635.86,256.34) 652.93,273.41 cw(c635.86,256.34) 660,256.34 ; 660,304.62 cw(c635.86,304.62) 652.93,287.55 ccw(c635.86,304.62) 660,304.62 ; 660,304.62 ccw(c684.14,304.62) 667.07,287.55 cw(c684.14,304.62) 660,304.62
  Bottom Layer w10: C5.2@570.5,-509.3 C5.2
  Bottom Layer w20: S2.1@-709,-891 S2.1@-514,-891 ; S2.1@-685.35,-904.81 cw(c-652.02,-938.14) -652.02,-891 cw(c-652.01,-843.85) S2.1@-685.35,-877.19 ; S2.1@-537.65,-904.81 ccw(c-570.98,-938.14) -570.98,-891 ccw(c-570.99,-843.85) S2.1@-537.65,-877.19 ; v1(280,-580) U3.1 530,-580 560,-580 571.3,-568.7 C5.2 ; v1@287.07,-587.07 cw(c304.14,-604.14) 304.14,-580 cw(c304.14,-555.86) v1@287.07,-572.93 ; R3.2 v1(660,280.48) ; U2.4@559.89,68.89 cw(c534.29,43.29) 570.5,43.29 cw(c606.71,43.29) U2.4@581.11,68.89 ; U2.4@570.31,83.63 U2.4@571.3,82.64 ; C5.2@570.5,-509.3 U2.4 ; 358.39,-580 cw(c358.39,-603.38) 374.92,-586.85 ccw(c358.39,-603.38) 358.39,-580 ; 358.39,-580 ccw(c358.39,-556.62) 374.92,-573.15 cw(c358.39,-556.62) 358.39,-580 ; 501.61,-580 cw(c501.61,-556.62) 485.08,-573.15 ccw(c501.61,-556.62) 501.61,-580 ; 501.61,-580 ccw(c501.61,-603.38) 485.08,-586.85 cw(c501.61,-603.38) 501.61,-580 ; 571.3,-546.32 cw(c607.52,-546.32) 581.91,-520.71 ccw(c607.52,-546.32) 571.3,-546.32 ; 571.3,-546.31 ccw(c535.09,-546.31) 560.69,-520.71 cw(c535.09,-546.31) 571.3,-546.31 ; 589.01,280.48 cw(c589.01,316.7) 563.4,291.09 ccw(c589.01,316.7) 589.01,280.48 ; 589,280.48 ccw(c589,244.27) 563.4,269.88 cw(c589,244.27) 589,280.48 ; 635.86,280.48 cw(c635.86,256.34) 652.93,273.41 ccw(c635.86,256.34) 635.86,280.48 ; 635.86,280.48 ccw(c635.86,304.62) 652.93,287.55 cw(c635.86,304.62) 635.86,280.48 ; C5.2@560.69,-499.49 ccw(c537.02,-475.82) 570.5,-475.82 cw(c537.02,-475.82) C5.2@560.69,-499.49 ; 570.5,-471.96 ccw(c609.44,-471.96) 581.91,-499.49 cw(c609.44,-471.96) 570.5,-471.96
RST: C3.2 R1.1 R2.2 U1.4 | length 2051.4
  Top Layer w10: R2.2 -440,257.7 ; -403.13,242.33 ccw(c-387.36,253.97) R1.1@-375.87,238.1 ; -397.13,234.21 ccw(c-381.44,245.8) R1.1 ; -318.05,375.1 ccw(c-284.29,384.14) C3.2 ; -316.5,376.65 cw(c-325.54,342.89) C3.2 ; -266.1,323.15 cw(c-257.05,356.91) C3.2 ; -264.55,324.7 ccw(c-298.31,315.66) C3.2 ; -161.38,223.96 cw(c-165.07,210.16) U1.4@-152.7,217.3 ; U1.4 -159.95,218.55 C3.2 ; -561.51,257.7 cw(c-561.51,305.99) -595.66,271.84 ccw(c-561.51,305.99) -561.51,257.7 ; -561.52,257.7 ccw(c-561.52,209.42) -595.66,243.56 cw(c-561.52,209.42) -561.52,257.7 ; -440,257.7 cw(c-440,202.49) -388.61,222.68 ccw(c-440,202.49) -440,257.7 ; -440,257.7 -440,370 -400,410 -351.4,410 C3.2 ; -440,257.7 -397.7,257.7 ; -397.7,257.7 cw(c-417.76,237.64) -389.75,233.16 ccw(c-417.76,237.64) -397.7,257.7 ; -397.7,257.7 ccw(c-377.65,277.75) -373.16,249.75 cw(c-377.65,277.75) -397.7,257.7 ; -397.7,257.7 R1.1 ; R1.1 ccw(c-410.65,214.02) -410.65,257.7 cw(c-410.65,214.02) R1.1 ; -325.44,384.05 cw(c-359.59,349.9) -311.3,349.9 ccw(c-359.59,349.9) -325.44,384.05 ; -325.44,384.04 ccw(c-291.3,418.18) -291.3,369.9 cw(c-291.3,418.18) -325.44,384.04 ; -257.16,315.76 cw(c-223.02,349.9) -271.3,349.9 ccw(c-223.02,349.9) -257.16,315.76 ; -257.15,315.76 ccw(c-291.3,281.61) -291.3,329.9 cw(c-291.3,281.61) -257.15,315.76 ; -425.32,257.7 cw(c-425.32,208.26) -379.31,226.34 ccw(c-425.32,208.26) -425.32,257.7 ; -395.97,257.7 cw(c-395.97,219.79) -360.69,233.66 ccw(c-395.97,219.79) -395.97,257.7 ; -170.87,229.47 ccw(c-150.54,249.8) -150.54,221.05 cw(c-150.54,249.8) -170.87,229.47
RX: P1.1 U1.5 | length 1508.3
  Top Layer w10: U1.5 -82.94,187.06 -70,200 ; v1(-40,200) -70,200 ; -70,200 cw(c-70,177.5) -52,191 ccw(c-70,177.5) -70,200 ; -70,200 ccw(c-70,222.5) -52,209 cw(c-70,222.5) -70,200
  Bottom Layer w10: P1.1 -400,1070 ; P1.1@-448.32,1059.06 cw(c-423.08,1035.4) -423.08,1070 cw(c-423.08,1104.6) P1.1@-448.32,1080.94 ; P1.1@-441.03,1052.22 cw(c-400,1013.78) -400,1070 ; P1.1@-441.03,1087.78 ccw(c-400,1126.22) -400,1070 ; v1@-50.61,210.61 ccw(c-76.21,236.21) -40,236.21 ccw(c-3.79,236.21) v1@-29.39,210.61 ; v1(-40,200) -40,250 -80,290 -160,290 -360,490 -360,1030 -400,1070
SCL: M1.5 U1.24 | length 1695.9
  Top Layer w10: M1.5 184.54,-574.49 257.42,-501.6 385.35,-501.6 430.12,-456.83 430.12,-30.83 369.72,29.58 U1.24 ; -284.13,-574.49 cw(c-284.13,-514.13) -326.81,-556.81 ccw(c-284.13,-514.13) -284.13,-574.49 ; -284.13,-574.49 ccw(c-284.13,-634.84) -326.81,-592.17 cw(c-284.13,-634.84) -284.13,-574.49 ; M1.5@-333.88,-585.09 cw(c-308.28,-610.7) -308.28,-574.49 ccw(c-308.28,-610.7) M1.5@-333.88,-585.09 ; M1.5@-333.88,-563.88 ccw(c-308.27,-538.27) -308.27,-574.49 cw(c-308.27,-538.27) M1.5@-333.88,-563.88
SDA: M1.3 U1.22 | length 1900.1
  Top Layer w10: -375.83,-750.81 ccw(c-337.54,-740.55) M1.3@-345.49,-779.39 ; -368.17,-743.14 cw(c-378.43,-781.44) M1.3@-339.59,-773.49 ; M1.3 -418.04,-700.94 -418.04,-566.85 -369.43,-518.24 174.27,-518.24 396.86,-295.64 396.86,-124.22 337.09,-64.44 U1.22 ; -387.16,-731.81 cw(c-429.84,-774.49) -369.49,-774.49 ccw(c-429.84,-774.49) -387.16,-731.81 ; -387.17,-731.81 ccw(c-344.49,-689.13) -344.49,-749.49 cw(c-344.49,-689.13) -387.17,-731.81 ; -370.09,-748.88 cw(c-395.7,-774.49) -359.49,-774.49 ccw(c-395.7,-774.49) -370.09,-748.88 ; -370.1,-748.88 ccw(c-344.49,-723.27) -344.49,-759.49 cw(c-344.49,-723.27) -370.1,-748.88
TX: P1.2 U1.7 | length 1408.4
  Top Layer w10: v1@-214.9,169 ccw(c-193.18,173.44) -198.92,152.03 ; v1(-210,170) -164.06,124.06 U1.7 ; v1@-209,174.9 cw(c-213.44,153.18) -192.03,158.92 ; -184.39,144.39 cw(c-158.79,170) -195,170 ccw(c-158.79,170) -184.39,144.39 ; -184.39,144.39 ccw(c-210,118.79) -210,155 cw(c-210,118.79) -184.39,144.39
  Bottom Layer w10: P1.2@-460,944 cw(c-460,857.09) -398.54,918.54 ; P1.2@-460,954 cw(c-460,891.23) -415.62,935.62 ; P1.2@-460,964 cw(c-460,925.37) -432.69,952.69 ; P1.2 -450,970 -390,910 -390,440 -210,260 v1(-210,170) ; P1.2@-434,970 ccw(c-395.37,970) -422.69,942.69 ; v1@-220.61,180.61 ccw(c-246.21,206.21) -210,206.21 ccw(c-173.79,206.21) v1@-199.39,180.61
VBAT: C3.1 C4.2 C6.2 C7.2 M1.2 M2.2 P1.4 R7.2 R9.2 S1.1 U1.29 U1.38 U3.3 | length 9300.3
  Top Layer w10: R9.2 -530.1,-379.8 -529.9,-380 ; C3.1 -374,305.21 ; -310.81,-28.8 ccw(c-257.19,-14.43) S1.1@-268.33,-68.82 ; -306.63,-44.43 ccw(c-260.82,-32.16) S1.1@-270.34,-78.61 ; -301.7,-19.68 cw(c-316.07,-73.31) S1.1@-261.68,-62.17 ; -299.61,-33.3 ccw(c-266.19,-24.35) S1.1@-267.09,-58.93 ; -297.2,-30.89 cw(c-306.16,-64.31) S1.1@-271.57,-63.41 ; -286.07,-23.87 cw(c-298.34,-69.68) S1.1@-251.89,-60.16 ; S1.1@-267.2,-63.3 -381.63,51.13 -552.42,51.13 -584.27,82.98 -584.27,128.02 -552.42,159.87 -360.13,159.87 -330,190 -330,261.21 -374,305.21 ; v1@118.54,125.07 cw(c140.25,120.62) 134.52,142.03 ; v1(123.43,124.06) 186.43,187.06 U1.29 ; v1@124.44,119.16 ccw(c119.99,140.88) 141.4,135.15 ; -559.42,-379.8 cw(c-559.42,-331.52) -593.56,-365.66 ccw(c-559.42,-331.52) -559.42,-379.8 ; -559.42,-379.8 ccw(c-559.42,-428.08) -593.56,-393.94 cw(c-559.42,-428.08) -559.42,-379.8 ; -374,305.21 cw(c-333.85,305.21) -360.65,335.11 ccw(c-333.85,305.21) -374,305.21 ; -374,305.21 ccw(c-414.14,305.21) -387.35,335.11 cw(c-414.14,305.21) -374,305.21 ; -308.8,-21.7 cw(c-350.4,-63.3) -291.57,-63.3 ccw(c-350.4,-63.3) -308.8,-21.7 ; -308.81,-21.7 ccw(c-267.2,19.91) -267.2,-38.93 cw(c-267.2,19.91) -308.81,-21.7 ; 149.04,149.67 cw(c123.43,175.28) 123.43,139.06 ccw(c123.43,175.28) 149.04,149.67 ; 149.04,149.67 ccw(c174.65,124.06) 138.43,124.06 cw(c174.65,124.06) 149.04,149.67 ; -325.88,-4.63 ccw(c-267.2,54.05) -267.2,-28.93 cw(c-267.2,54.05) -325.88,-4.63 ; -325.87,-4.63 cw(c-384.54,-63.3) -301.57,-63.3 ccw(c-384.54,-63.3) -325.87,-4.63
  Top Layer w20: P1.4 -350,770 -333.07,786.93 M2.2 ; -371.24,-849.29 ccw(c-337.48,-840.24) M1.2 ; -369.69,-847.74 cw(c-378.73,-881.5) M1.2 ; S1.1@-267.2,-63.3 -527,-63.3 -529.9,-66.2 -529.9,-380 -529.9,-689.08 M1.2 ; -215.35,760.18 cw(c-206.31,793.94) M2.2 ; -213.8,761.73 ccw(c-247.56,752.68) M2.2 ; R7.2 -135.81,649.48 -172.53,686.2 -172.53,718.91 M2.2 ; v1(123.43,124.06) U1.38@123.43,375.54 ; -529.9,-137.11 cw(c-458.99,-137.11) S1.1@-509.13,-86.97 ; -529.9,-137.1 ccw(c-600.8,-137.1) -550.67,-86.97 cw(c-600.8,-137.1) -529.9,-137.1 ; -529.9,-137.11 cw(c-458.99,-137.11) S1.1@-509.13,-86.97 ; S1.1@-509.13,-86.97 cw(c-452,-144.1) -452,-63.3 ccw(c-452,-144.1) S1.1@-509.13,-86.97 ; -409.3,770 cw(c-409.3,820.7) -445.15,784.85 ccw(c-409.3,820.7) -409.3,770 ; -409.3,770 ccw(c-409.3,719.3) -445.15,755.15 cw(c-409.3,719.3) -409.3,770 ; -378.63,-840.35 cw(c-412.77,-874.49) -364.49,-874.49 ccw(c-412.77,-874.49) -378.63,-840.35 ; -378.63,-840.35 ccw(c-344.49,-806.2) -344.49,-854.49 cw(c-344.49,-806.2) -378.63,-840.35 ; -338.1,-63.3 cw(c-338.1,-134.2) -287.97,-84.07 ccw(c-338.1,-134.2) -338.1,-63.3 ; -338.11,-63.3 ccw(c-338.11,7.61) -287.97,-42.53 cw(c-338.11,7.61) -338.11,-63.3 ; -288.84,786.93 cw(c-288.84,738.64) -254.69,772.79 ccw(c-288.84,738.64) -288.84,786.93 ; -288.84,786.93 ccw(c-288.84,835.21) -254.69,801.07 cw(c-288.84,835.21) -288.84,786.93 ; -206.41,752.79 cw(c-172.27,786.93) -220.55,786.93 ccw(c-172.27,786.93) -206.41,752.79 ; -206.41,752.79 ccw(c-240.55,718.64) -240.55,766.93 cw(c-240.55,718.64) -206.41,752.79 ; -116.85,649.48 cw(c-116.85,613.27) -91.25,638.87 ccw(c-116.85,613.27) -116.85,649.48 ; -116.86,649.48 ccw(c-116.86,685.69) -91.25,660.09 cw(c-116.86,685.69) -116.86,649.48 ; 123.43,148.21 cw(c99.29,148.21) 116.36,131.13 ccw(c99.29,148.21) 123.43,148.21 ; 123.43,148.21 ccw(c147.58,148.21) 130.51,131.13 cw(c147.58,148.21) 123.43,148.21 ; S1.1@-509.13,-45.43 ccw(c-465.99,-2.29) -465.99,-63.3 cw(c-465.99,-2.29) S1.1@-509.13,-45.43
  Bottom Layer w10: 64.39,124.39 64.71,124.06 ; C7.2@123.43,215.43 C7.2 C7.2@131.3,223.3
  Bottom Layer w20: M1.2@-344.49,-894.49 cw(c-344.49,-942.77) -310.35,-908.63 cw(c-276.2,-874.49) M1.2@-324.49,-874.49 ; M1.2 -308.98,-910 400,-910 430,-880 U3.3 571.2,-780 C4.2 ; S1.1@-270.1,-66.2 -267.2,-63.3 -123.3,-63.3 64.39,124.39 ; M2.2@-260.55,786.93 cw(c-308.84,786.93) -274.69,752.79 cw(c-240.55,718.65) M2.2@-240.55,766.93 ; S1.1@-246.43,-84.07 cw(c-196.3,-134.2) -196.3,-63.3 cw(c-196.29,7.61) S1.1@-246.43,-42.53 ; M2.2 -303.7,723.78 -303.7,610.39 -33.22,339.9 C6.2 C7.2@131.3,223.3 ; 64.71,124.06 v1(123.43,124.06) C7.2@123.43,215.43 ; v1@116.36,116.99 ccw(c99.29,99.92) 99.29,124.06 ccw(c99.29,148.21) 116.36,131.13 ccw(c99.29,148.21) 123.43,148.21 ccw(c147.58,148.21) v1@130.51,131.13 ; C7.2@117.39,204.39 cw(c102.81,189.81) 123.43,189.81 ; C7.2@117.39,235.61 ccw(c83.82,269.18) 131.3,269.18 ; 123.43,167.76 cw(c175.24,167.76) C7.2@138.61,204.39 ; 131.3,253.25 ccw(c156.25,253.25) C7.2@138.61,235.61 ; 95.09,339.9 cw(c95.09,303.69) C6.2@120.69,329.29 ; 95.09,339.9 ccw(c95.09,376.11) 120.69,350.51 cw(c95.09,376.11) 95.09,339.9 ; 95.09,339.9 cw(c95.09,303.69) C6.2@120.69,329.29 ; C6.2@120.69,329.29 cw(c95.09,303.69) 131.3,303.69 ; C6.2@120.69,329.29 cw(c95.09,303.69) 131.3,303.69 ; 131.3,303.69 cw(c167.51,303.69) 141.91,329.29 ccw(c167.51,303.69) 131.3,303.69 ; 430,-803.38 cw(c453.38,-803.38) 436.85,-786.85 ccw(c453.38,-803.38) 430,-803.38 ; 430,-803.38 ccw(c406.62,-803.38) 423.15,-786.85 cw(c406.62,-803.38) 430,-803.38 ; 501.61,-780 cw(c501.61,-756.62) 485.08,-773.15 ccw(c501.61,-756.62) 501.61,-780 ; 501.61,-780 ccw(c501.61,-803.38) 485.08,-786.85 cw(c501.61,-803.38) 501.61,-780 ; 534.85,-780 cw(c534.85,-816.55) 560.69,-790.71 ccw(c534.85,-816.55) 534.85,-780 ; 535.33,-780 ccw(c535.33,-744.13) 560.69,-769.49 cw(c535.33,-744.13) 535.33,-780
VIN: P3.1 P4.2 S2.2 | length 3759.4
  Top Layer w20: S2.2@-709,-969.5 -488.5,-1190 590,-1190 630,-1150 630,-1050 553,-973 553,-903 540,-903 P4.2@527,-903 ; P4.2@525.29,-922.45 cw(c522.22,-957.22) 552.45,-939.77 ; P4.2@534.95,-921.86 cw(c529.46,-942.32) P4.2@547.81,-931.73 ; P4.2@542.05,-915.44 ccw(c558.05,-928.66) 544.1,-944.02 ; P4.2@545.86,-908.05 ccw(c579.35,-917.03) 549.33,-934.36 ; 549.2,-934.14 cw(c559.94,-927.94) P4.2@552.19,-918.25 ; P4.2@544.55,-911.56 ccw(c576.5,-927.14) 547.07,-947.07 ; P4.2@544.55,-911.56 ccw(c576.5,-927.14) 547.07,-947.07 ; P4.2@544.55,-911.56 ccw(c576.5,-927.14) 547.07,-947.07 ; 553,-950.14 cw(c600.14,-950.14) 566.81,-916.81 ccw(c600.14,-950.14) 553,-950.14 ; 553,-950.14 ccw(c505.86,-950.14) 539.19,-916.81 cw(c505.86,-950.14) 553,-950.14 ; P4.2@518.06,-920.36 cw(c488.53,-977.67) 553,-977.67 ccw(c488.53,-977.67) P4.2@518.06,-920.36 ; P4.2@527.22,-917.76 cw(c478.35,-974.19) 553,-974.19 ccw(c478.35,-974.19) P4.2@527.22,-917.76 ; P4.2@527.22,-902.58 cw(c505.43,-944.87) 553,-944.87 ccw(c505.43,-944.87) P4.2@527.22,-902.58 ; P4.2@540.31,-902.64 cw(c516.26,-930.42) 553,-930.42 ccw(c516.26,-930.42) P4.2@540.31,-902.64
  Bottom Layer w20: S2.2@-709,-969.5 -514,-969.5 -513.5,-970 -450,-970 -370,-1050 -300,-1050 -200,-1150 -20,-1150 64,-1066 P3.1 ; S2.2@-685.35,-983.31 cw(c-652.02,-1016.64) -652.02,-969.5 cw(c-652.01,-922.35) S2.2@-685.35,-955.69 ; S2.2@-537.65,-983.31 ccw(c-570.98,-1016.64) -570.98,-969.5 ccw(c-570.99,-922.35) S2.2@-537.65,-955.69 ; S2.2@-490.35,-983.31 cw(c-458.22,-1015.44) -458.22,-970 ; S2.2@-490.35,-955.69 ccw(c-455.81,-921.15) -455.81,-970
XTAL1: C2.1 U1.15 Y1.1 | length 1373.9
  Top Layer w10: U1.15 28.97,-128.97 130,-230 Y1.1 174,-246 C2.1 ; 85.77,-189.67 ccw(c143.47,-174.21) Y1.1@113.6,-225.94 ; 92.02,-212.99 ccw(c126.4,-203.77) Y1.1@108.6,-234.6 ; Y1.1@98.54,-222.66 ccw(c81.22,-212.66) 100.54,-207.48 ; Y1.1@177.39,-237.52 cw(c157.8,-249.21) 177.55,-260.61 ; Y1.1@179.18,-239.93 cw(c160.52,-257.06) 182.14,-270.26 ; 181.66,-253.5 cw(c198.98,-263.51) Y1.1@193.8,-244.18 ; Y1.1@186.55,-233.17 cw(c170.7,-247.72) 189.06,-258.93 ; 174,-361.72 cw(c125.72,-361.72) 159.86,-395.86 ccw(c125.72,-361.72) 174,-361.72 ; 174,-361.71 ccw(c222.29,-361.71) 188.14,-395.86 cw(c222.29,-361.71) 174,-361.71 ; 72.94,-172.94 cw(c15.88,-230) 96.57,-230 ccw(c15.88,-230) 72.94,-172.94 ; 90.01,-190.01 cw(c50.02,-230) 106.57,-230 ccw(c50.02,-230) 90.01,-190.01 ; 107.08,-207.08 cw(c84.16,-230) 116.57,-230 ccw(c84.16,-230) 107.08,-207.08 ; 174,-304.08 cw(c264.08,-304.08) 200.38,-240.38 ccw(c264.08,-304.08) 174,-304.08 ; 174,-279.94 cw(c239.94,-279.94) 193.31,-233.31 ccw(c239.94,-279.94) 174,-279.94 ; 174,-255.8 cw(c215.8,-255.8) 186.24,-226.24 ccw(c215.8,-255.8) 174,-255.8
XTAL2: C1.1 U1.14 Y1.2 | length 1776.1
  Top Layer w10: Y1.2@-160.26,-244.18 cw(c-165.43,-263.51) -148.11,-253.5 ; Y1.2@-156.57,-244.68 cw(c-156.76,-270.17) -134.69,-257.42 ; Y1.2 Y1.2@-140,-230 ; -153.88,-259.54 cw(c-135.29,-246.97) Y1.2@-152.8,-232.93 ; Y1.2@-151.98,-231.37 ccw(c-128.81,-238.47) -149.79,-250.59 ; -146.28,-270.78 cw(c-124.21,-255.85) Y1.2@-145,-239.18 ; Y1.2@-142.42,-234.3 ccw(c-98.79,-247.67) -138.31,-270.49 ; Y1.2@-142.27,-233.8 ccw(c-124.96,-238.44) Y1.2@-140.48,-247.4 ; C1.1 -134,-236 Y1.2@-140,-230 ; Y1.2@-80.12,-225.98 ccw(c-110.79,-174.51) -52.71,-189.21 ; Y1.2@-80.06,-225.94 ccw(c-93.44,-202.77) -67.59,-209.69 ; Y1.2@-74.99,-234.57 ccw(c-93.31,-203.84) -58.63,-212.61 ; -67,-207.48 ccw(c-47.68,-212.66) Y1.2@-65,-222.66 ; U1.14 -2.53,-127.47 -105.06,-230 Y1.2@-140,-230 ; -134,-361.72 cw(c-182.28,-361.72) -148.14,-395.86 ccw(c-182.28,-361.72) -134,-361.72 ; -134,-361.71 ccw(c-85.71,-361.71) -119.86,-395.86 cw(c-85.71,-361.71) -134,-361.71 ; Y1.2@-166.84,-240.38 cw(c-246.12,-319.67) -134,-319.67 ccw(c-246.12,-319.67) Y1.2@-166.84,-240.38 ; Y1.2@-159.77,-233.31 cw(c-221.98,-295.52) -134,-295.52 ccw(c-221.98,-295.52) Y1.2@-159.77,-233.31 ; Y1.2@-152.7,-226.24 cw(c-197.84,-271.38) -134,-271.38 ccw(c-197.84,-271.38) Y1.2@-152.7,-226.24 ; Y1.2@-145.63,-219.17 cw(c-173.7,-247.24) -134,-247.24 ccw(c-173.7,-247.24) Y1.2@-145.63,-219.17 ; Y1.2@-103.03,-230 cw(c-98.14,-230) -101.6,-226.54 ccw(c-98.14,-230) Y1.2@-103.03,-230 ; Y1.2@-93.03,-230 cw(c-64,-230) -84.53,-209.47 ccw(c-64,-230) Y1.2@-93.03,-230 ; Y1.2@-83.03,-230 cw(c-29.85,-230) -67.46,-192.4 ccw(c-29.85,-230) Y1.2@-83.03,-230 ; Y1.2@-73.03,-230 cw(c4.29,-230) -50.39,-175.33 ccw(c4.29,-230) Y1.2@-73.03,-230 ; Y1.2@-63.03,-230 cw(c38.43,-230) -33.31,-158.26 ccw(c38.43,-230) Y1.2@-63.03,-230
pads on no net: P3.2 P3.3 P3.4 S2.3 U1.1 U1.2 U1.3 U1.6 U1.10 U1.11 U1.12 U1.13 U1.17 U1.18 U1.19 U1.20 U1.21 U1.23 U1.25 U1.26 U1.27 U1.28 U1.30 U1.31 U1.32 U1.33 U1.34 U1.35 U1.36 U1.37 U1.39 U1.40 U1.41 U1.42 U1.44
copper on no net:
  other v2: -338.98,-1118.98 350,-1118.98 350,-430 -344.49,-424.49

## Polygon pours and split planes (outlines as drawn)
GND on Bottom Layer "Bottom Layer-No Net" (solid, remove dead copper, pour order 3): 1120,1780 960,1620 -1340,1620 -1340,-1290 -860,-1770 -750,-1880 1540,-1880

## Keep-outs
Keep-Out Layer:
  lines w10: -814.4,-1180.84 -777.56,-1180.84 cw(c-777.56,-1309.05) -649.34,-1309.05 -649.34,-1345.89 -303.15,-1345.89 -303.15,-1232.28 -248.03,-1232.28 -248.03,-1345.89 248.03,-1345.89 248.03,-1232.28 303.15,-1232.28 303.15,-1345.89 649.35,-1345.89 649.34,-1309.05 cw(c777.56,-1309.05) 777.56,-1180.84 814.4,-1180.84 814.4,-682.08 700.79,-682.08 700.79,-626.97 814.4,-626.97 814.4,-139.4 814.4,-128.21 777.56,-128.21 cw(c777.56,0) 777.56,128.22 814.4,128.22 814.4,626.97 700.79,626.97 700.79,682.09 814.4,682.09 814.4,1180.84 777.56,1180.84 cw(c777.56,1309.06) 649.34,1309.06 649.34,1345.89 303.15,1345.9 303.15,1232.29 248.03,1232.29 248.03,1345.9 -248.03,1345.9 -248.03,1232.29 -303.15,1232.29 -303.15,1345.9 -649.34,1345.9 -649.34,1309.06 cw(c-777.56,1309.05) -777.56,1180.84 -814.4,1180.84 -814.4,682.09 -700.79,682.09 -700.79,626.97 -814.4,626.97 -814.4,128.22 -777.56,128.21 cw(c-777.56,0) -777.56,-128.21 -814.4,-128.21 -814.4,-626.97 -700.79,-626.97 -700.79,-682.08 -814.4,-682.08 -814.4,-1180.84

## Silkscreen, mask and mechanical layers (free items; w line width, h text height)
Top Overlay:
  drawing of 3004 lines, arcs and shapes, not listed
  text "RxD" at -680,1040 h60
  text "TxD" at -680,940 h60
  text "GND" at -680,840 h60
  text "VCC" at -680,740 h60

## Text inside footprints (layer, text, board x,y; h text height)
P3: Bottom Overlay "G" at -99,-1015 h30; Bottom Overlay "V" at 120,-1015 h30